# Altium PCB 遥控器V2.0.PcbDoc
Units mm, origin at the board's own origin, x right, y up, seen from the top; angles counter-clockwise.
Board outline 95.64 x 46.61 mm, 2 copper layers (Top Layer, Bottom Layer); 54 components, 52 nets, 239 pads, 54 vias.
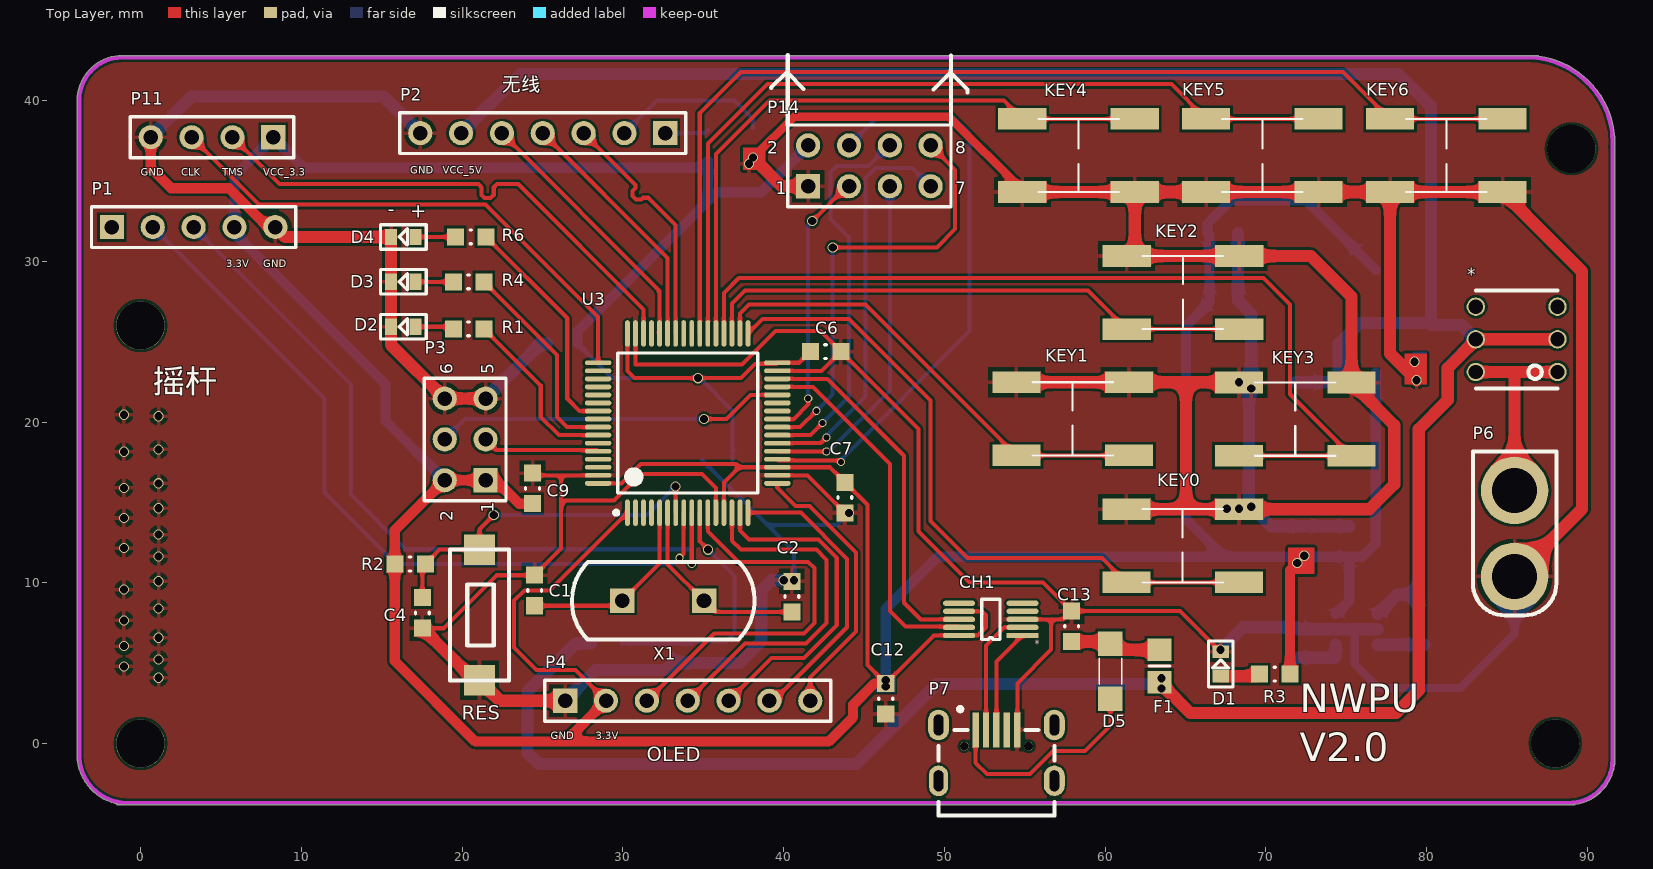
[diagram p0: Top Layer view]
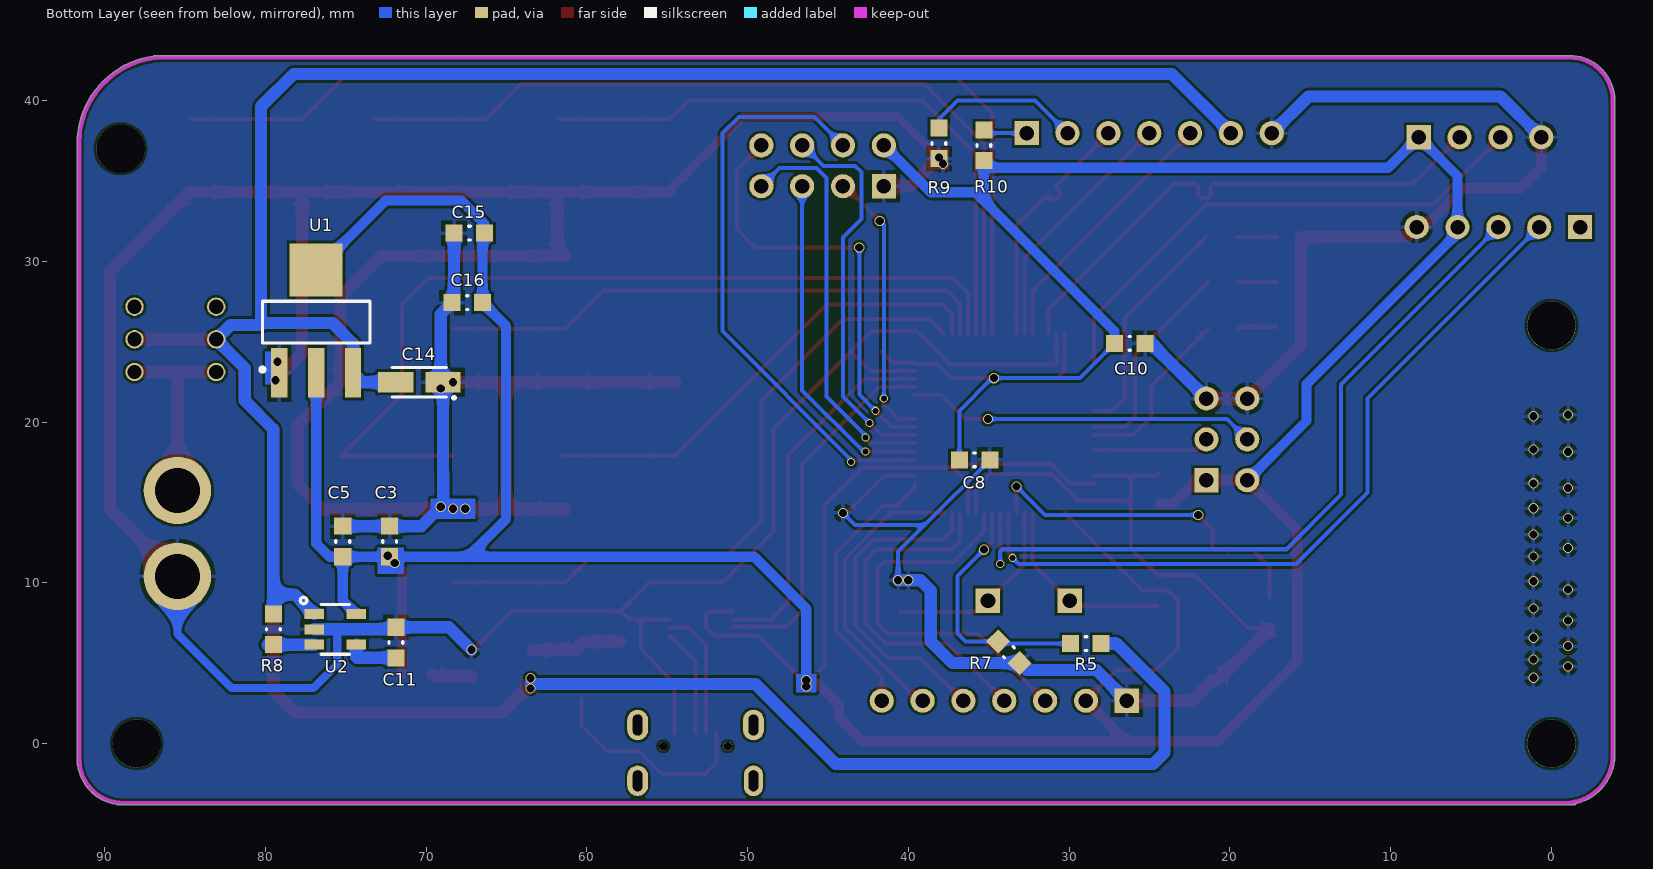
[diagram p1: Bottom Layer view, seen from below]

## Layer stack, top to bottom
Top Solder: solder mask 0.0102, Solder Resist, Dk 3.5
Top Layer: signal copper 0.0356
Dielectric 1: dielectric 0.32, FR-4, Dk 4.8
Bottom Layer: signal copper 0.0356
Bottom Solder: solder mask 0.0102, Solder Resist, Dk 3.5

## Board outline
-1.514,-3.734 cw(c-0.826,-0.699) -3.913,-1.091 cw(c-3.81,-1.016) -3.937,-1.016 -3.937,-0.763 cw(c-0.826,-0.699) -3.937,-0.634 cw(c-0.826,-0.699) -3.937,-0.632 -3.937,-0.634 -3.937,40.005 cw(c-1.143,40.005) -1.143,42.799 86.868,42.799 cw(c86.868,42.672) 86.963,42.756 cw(c86.233,37.338) 91.7,37.338 cw(c86.233,37.338) 91.694,37.081 91.694,-1.27 cw(c91.567,-1.27) 91.668,-1.348 cw(c88.837,-0.953) 89.232,-3.784 cw(c89.154,-3.683) 89.154,-3.81 88.902,-3.81 cw(c88.837,-0.953) 88.771,-3.81 cw(c88.837,-0.953) 88.77,-3.81 88.771,-3.81 -1.397,-3.81 cw(c-1.397,-3.683)

## Design rules (kind name [scope] priority, off if disabled: settings)
Clearance [All] p1: gap=0.152 ignorepadtopadclearanceinfootprint=FALSE except(0: Arc-Hole Track-Hole SMDPad-Hole THPad-Hole Via-Hole Fill-Hole Poly-Hole Region-Hole Text-Hole)
PlaneConnect [All] p1: planeconnectstyle=Direct reliefexpansion=0.508 reliefentries=4 reliefconductorwidth=0.254 reliefairgap=0.254
PolygonConnect [All] p1: connectstyle=Relief reliefconductorwidth=0.254 reliefentries=4 polygonreliefangle="90 Angle" airgapwidth=0.254
RoutingVias [All] p1: holewidth=0.711 width=1.27 viastyle="Through Hole" minholewidth=0.711 minwidth=1.27 maxholewidth=0.711 maxwidth=1.27
SolderMaskExpansion [All] p1: expansion=0.102
Width VCC_3.3 [All] p1: maxlimit=0.762 minlimit=0.254 preferedwidth=0.508
Width GND [InNet('GND')] p2: maxlimit=0.762 minlimit=0.254 preferedwidth=0.762
Width VCC_3.7 [InNet('VCC_3.7')] p3: maxlimit=0.762 minlimit=0.254 preferedwidth=0.635
Width [All] p4: maxlimit=0.762 minlimit=0.152 preferedwidth=0.254
29 further rules are at their usual default settings.

## Components (designator, comment, footprint, x,y, rotation, side; value= is the part's Value field where it differs from the comment)
* "自锁开关7*7" 自锁开关7*7 88.138,23.114 r90 top
C1 "22p" C0603 24.511,9.525 r90 top
C2 "22p" C0603 40.513,9.144 r90 top
C3 "106" C0603 72.263,12.573 r270 bottom
C4 "104" C0603 17.526,8.128 r270 top
C5 "1uF" C0603 75.184,12.573 r90 bottom
C6 "104" C0603 42.611,24.384 r0 top
C7 "104" C0603 43.815,15.306 r90 top
C8 "104" C0603 35.88,17.653 r180 bottom
C9 "104" C0603 24.384,15.875 r90 top
C10 "104" C0603 26.228,24.892 r180 bottom
C11 "22nF" C0603 71.882,6.289 r90 bottom
C12 "104" C0603 46.355,2.794 r270 top
C13 "104" C0603 57.912,7.3 r90 top
C14 "47uF" A3216 70.427,22.479 r0 bottom
C15 "104" C0603 67.31,31.75 r180 bottom
C16 "104" C0603 67.437,27.432 r180 bottom
CH1 "CH340E" CH340E 52.832,7.747 r180 top
D1 "LED_WYN" 极性0603 67.183,4.953 r90 top
D2 "LED_WYN" 极性0603 16.345,25.93 r180 top
D3 "LED_WYN" 极性0603 16.345,28.724 r180 top
D4 "LED_WYN" 极性0603 16.345,31.518 r180 top
D5 "肖特基二极管" 1206 60.325,2.794 r90 top
F1 "0.5A" 6-0805_M 63.373,4.826 r270 top
KEY0 "6*6*9mm微动开关" 6*6*9mm贴片微动开关 68.326,10.033 r180 top
KEY1 "6*6*9mm微动开关" 6*6*9mm贴片微动开关 61.483,17.929 r180 top
KEY2 "6*6*9mm微动开关" 6*6*9mm贴片微动开关 68.341,25.781 r180 top
KEY3 "6*6*9mm微动开关" 6*6*9mm贴片微动开关 75.326,17.907 r180 top
KEY4 "6*6*9mm微动开关" 6*6*9mm贴片微动开关 54.849,38.862 r0 top
KEY5 "6*6*9mm微动开关" 6*6*9mm贴片微动开关 66.279,38.862 r0 top
KEY6 "6*6*9mm微动开关" 6*6*9mm贴片微动开关 77.724,38.862 r0 top
P1 "Header 5" HDR1X5 -1.778,32.131 r0 top
P2 "Header 7" HDR1X7 32.639,37.973 r180 top
P3 "Header 3X2" HDR2X3 21.463,16.383 r90 top
P4 "Header 7" HDR1X7 26.416,2.667 r0 top
P6 "Header 2" XT30_ĸ 85.471,10.398 r270 top
P7 "Micro USB 母座" "Micro USB 直插母座" 54.54,0.847 r0 top
P11 "2_JTAG" HDR1X4 8.255,37.719 r180 top
P14 "Header 4X2" HDR2X4 41.529,34.671 r0 top
R1 "10k" C0603 20.409,25.803 r180 top
R2 "10k" C0603 16.764,11.176 r0 top
R3 "4.7k" C0603 70.551,4.318 r0 top
R4 "10k" C0603 20.409,28.724 r180 top
R5 "1k" C0603 28.956,6.223 r180 bottom
R6 "10k" C0603 20.536,31.518 r180 top
R7 "1k" C0603 33.751,5.684 r45 bottom
R8 "1k" C0603 79.502,7.112 r270 bottom
R9 "10k" R0603 38.1,37.338 r270 bottom
R10 "10k" R0603 35.306,37.211 r270 bottom
RES "RST_BUTTON" CLCK 21.082,12.065 r270 top
U1 "AMS1117-3.3V" AMS1117-SOT223 79.135,23.264 r90 bottom
U2 "RT9193" SOT-23-5 75.652,7.112 r180 bottom
U3 "STM32_F103" STM32TSQFP50P1200X1200X160-64N 34.036,19.939 r90 top
X1 "XTAL" XTAL_D 35.052,8.89 r180 top

## Footprints (in the part's own frame and the unit in brackets; to place one, negate y for a bottom-side part, rotate by r counter-clockwise, add the part's x,y. Pads: shape width x height; smd on the part's side, far side on the other; paste and mask are expansions set on the pad)
6*6*9mm贴片微动开关 [mm]
  rect 3x1.35 smd: 1(0,0) 2(7,0) 3(0,-4.55) 4(7,-4.55)
  silkscreen extent 1,-4.55 6,0, body extent 0,-4.55 7,0, height 3
6-0805_M [mm] "Chip Resistor, Body 2.0x1.2mm, IPC Low Density"
  rect 1.4x1.5 smd: 1(-1,0) 2(1,0)
  silkscreen extent 0,-0.65 0,0.65, body extent -1.07,-0.7 1.07,0.7, height 0.7
1206 [mil]
  rect 60x60 smd: 1(0,0) 2(135,0)
  silkscreen extent 35,-28 98,28
A3216 [mm] "1206封装"
  rect 2.2x1.3 smd: 1(-1.475,0) 2(1.455,0)
  silkscreen extent -2.21,-0.91 1.68,1.02, body extent -1.7,-0.9 1.7,0.9, height 1.8
AMS1117-SOT223 [mm]
  rect 3.1x1 smd: 1(-0.2,0) 2(-0.2,-2.3) 3(-0.2,-4.6)
  rect 3.3x3.3 smd: 4(6.2,-2.3)
  silkscreen extent -0.12,-5.65 4.25,1.18, body extent 1.1,-5.65 4.8,1.05, height 1.8
C0603 [mm]
  rect 1.06x1.06 smd: 1(-0.95,0) 2(0.95,0)
  silkscreen extent -0.05,-0.43 0.05,0.43, body extent -0.85,-0.48 0.85,0.47, height 0.95
CH340E [mm]
  rect 2x0.33 smd: 1(-2.032,1.016)
  oval 2x0.33 smd: 2(-2.032,0.516) 3(-2.032,0.016) 4(-2.032,-0.484) 5(-2.032,-0.984) 6(1.918,-0.984) 7(1.918,-0.484) 8(1.918,0.016) 9(1.918,0.516) 10(1.918,1.016)
  silkscreen extent -0.64,-1.23 0.51,1.27
CLCK [mil]
  rect 75x75 smd: 1(0,0) 2(320,0)
  silkscreen extent 0,-72 320,72
HDR1X4 [mm] "Connector; Header; 4 Position"
  rect 1.5x1.5 hole 0.9: 1(0,0)
  round 1.5 hole 0.9: 2(2.54,0) 3(5.08,0) 4(7.62,0)
  silkscreen extent -1.27,-1.27 8.89,1.27
HDR1X5 [mm] "Connector; Header; 5 Position"
  rect 1.5x1.5 hole 0.9: 1(0,0)
  round 1.5 hole 0.9: 2(2.54,0) 3(5.08,0) 4(7.62,0) 5(10.16,0)
  silkscreen extent -1.27,-1.27 11.43,1.27
HDR1X7 [mm] "Connector; Header; 7 Position"
  rect 1.5x1.5 hole 0.9: 1(0,0)
  round 1.5 hole 0.9: 2(2.54,0) 3(5.08,0) 4(7.62,0) 5(10.16,0) 6(12.7,0) 7(15.24,0)
  silkscreen extent -1.27,-1.27 16.51,1.27
HDR2X3 [mm] "Connector; Header; 3x2 Position"
  rect 1.5x1.5 hole 0.9: 1(0,0)
  round 1.5 hole 0.9: 2(0,2.54) 3(2.54,0) 4(2.54,2.54) 5(5.08,0) 6(5.08,2.54)
  silkscreen extent -1.27,-1.27 6.35,3.81
HDR2X4 [mm] "Connector; Header; 4x2 Position"
  rect 1.5x1.5 hole 0.9: 1(0,0)
  round 1.5 hole 0.9: 2(0,2.54) 3(2.54,0) 4(2.54,2.54) 5(5.08,0) 6(5.08,2.54) 7(7.62,0) 8(7.62,2.54)
  silkscreen extent -1.27,-1.27 8.89,3.81
"Micro USB 直插母座" [mm] "四脚直插母座"
  rect 0.4x2.15 smd: 1(-2.6,0) 2(-1.95,0) 3(-1.3,0) 4(-0.65,0) 5(0,0)
  oval 1.2x1.9 hole 0.6 slot 1.3 at 90 deg: DW(-4.9,-3.16)
  oval 1.3x1.9 hole 0.6 slot 1.3 at 90 deg: DW(-4.9,0.31) DW(2.3,-3.16) DW(2.3,0.31)
  round 0.55 hole 0.55: DW(-3.3,-1.01) DW(0.7,-1.01)
  silkscreen extent -4.9,-5.31 2.3,1.42
R0603 [mm]
  rect 1.06x1.06 smd: 1(-0.95,0) 2(0.95,0)
  silkscreen extent -0.05,-0.43 0.05,0.43, body extent -0.85,-0.48 0.85,0.47, height 0.95
SOT-23-5 [mm]
  rect 1.22x0.62 smd mask+0.07: 1(-1.31,0.95) 2(-1.31,0) 4(1.31,-0.95)
  rect 1.2x0.62 smd mask+0.07: 3(-1.31,-0.95)
  rect 1.22x0.62 smd: 5(1.31,0.95)
  silkscreen extent -2.17,-1.55 0.88,1.99, body extent -1.93,-1.45 1.92,1.45, height 1
STM32TSQFP50P1200X1200X160-64N [mm] "TSQFP, 64-Leads, Body 12.0x12.0mm (max), Pitch 0.50mm, IPC Medium Density"
  oval 1.65x0.3 smd: 1(-5.575,3.75) 2(-5.575,3.25) 3(-5.575,2.75) 4(-5.575,2.25) 5(-5.575,1.75) 6(-5.575,1.25) 7(-5.575,0.75) 8(-5.575,0.25) 9(-5.575,-0.25) 10(-5.575,-0.75) 11(-5.575,-1.25) 12(-5.575,-1.75) 13(-5.575,-2.25) 14(-5.575,-2.75) 15(-5.575,-3.25) 16(-5.575,-3.75) 33(5.575,-3.75) 34(5.575,-3.25) 35(5.575,-2.75) 36(5.575,-2.25) 37(5.575,-1.75) 38(5.575,-1.25) 39(5.575,-0.75) 40(5.575,-0.25) 41(5.575,0.25) 42(5.575,0.75) 43(5.575,1.25) 44(5.575,1.75) 45(5.575,2.25) 46(5.575,2.75) 47(5.575,3.25) 48(5.575,3.75)
  oval 0.3x1.65 smd: 17(-3.75,-5.575) 18(-3.25,-5.575) 19(-2.75,-5.575) 20(-2.25,-5.575) 21(-1.75,-5.575) 22(-1.25,-5.575) 23(-0.75,-5.575) 24(-0.25,-5.575) 25(0.25,-5.575) 26(0.75,-5.575) 27(1.25,-5.575) 28(1.75,-5.575) 29(2.25,-5.575) 30(2.75,-5.575) 31(3.25,-5.575) 32(3.75,-5.575) 49(3.75,5.575) 50(3.25,5.575) 51(2.75,5.575) 52(2.25,5.575) 53(1.75,5.575) 54(1.25,5.575) 55(0.75,5.575) 56(0.25,5.575) 57(-0.25,5.575) 58(-0.75,5.575) 59(-1.25,5.575) 60(-1.75,5.575) 61(-2.25,5.575) 62(-2.75,5.575) 63(-3.25,5.575) 64(-3.75,5.575)
  silkscreen extent -5.7,-4.35 4.35,4.57, body extent -5,-5 5,5, height 1.6
XT30_ĸ [mm]
  round 4.2 hole 2.8: 1(-5.35,0) 2(0,0)
  silkscreen extent -7.78,-2.6 2.42,2.6, body extent -7.78,-2.6 2.43,2.6, height 11
XTAL_D [mil]
  rect 60x60 hole 36 paste+0: 1(0,0) 2(200,0)
  silkscreen extent -124,-95 324,95
极性0603 [mil]
  rect 30x40 smd: 1(-30,0) 2(30,0)
  silkscreen extent -56,-30 56,30
自锁开关7*7 [mil]
  round 45 hole 35: 1(0,0) 2(80,0) 3(160,0) 4(160,200) 5(80,200) 6(0,200)
  silkscreen extent -40,0 200,200

## Part data
C1 C2 C4 C5 C6 C7 C8 C9 C10 C11: library part CAP_WYN
C3 C12 C13 C15 C16: library part Cap
C14: library part Cap_Pol
D5: library part ZENER, "Zener Diode"
F1: library part FUSE
P1: "Header, 5-Pin", LatestRevisionDate=17-Jul-2002, LatestRevisionNote="Re-released for DXP Platform.", Publisher="Altium Limited"
P2 P4: "Header, 7-Pin", LatestRevisionDate=17-Jul-2002, LatestRevisionNote="Re-released for DXP Platform.", Publisher="Altium Limited"
P3: "Header, 3-Pin, Dual row", LatestRevisionDate=17-Jul-2002, LatestRevisionNote="Re-released for DXP Platform.", Publisher="Altium Limited"
P6: "Header, 2-Pin", LatestRevisionDate=17-Jul-2002, LatestRevisionNote="Re-released for DXP Platform.", Publisher="Altium Limited"
P14: "Header, 4-Pin, Dual row", LatestRevisionDate=17-Jul-2002, LatestRevisionNote="Re-released for DXP Platform.", Publisher="Altium Limited"
R1 R2 R3 R4 R5 R6 R7: library part RES_WYN
R8: library part Resistor, "电阻"
R9 R10: library part Resistor

## Free pads (board coordinates)
  round 3 hole 3 unplated: 8(0,0) 9(88,0) 11(0,26) 12(89,37)

## Via types
v1: diameter 0.635, hole 0.508, Top Layer to Bottom Layer, 46 vias
v2: diameter 0.508, hole 0.381, Top Layer to Bottom Layer, 8 vias

## Nets (pads, with @x,y where several pads share a name; then routed paths per layer and width w, separated by ;. In a path a pad name is that pad's centre, name@x,y a point inside that pad or via, vN(x,y) a via of type N, cw(c..) or ccw(c..) an arc to the next point about the centre after c; other vN are vias at no path point)
ADC: R5.1 R7.2 U3.10 | length 15.9
  Top Layer w0.254: U3.10 34.786,12.585 v1(35.306,12.065) v1@35.433,11.938
  Bottom Layer w0.254: R5.1 34.29,6.223 R7.2 36.455,6.356 36.957,6.858 36.957,10.414 v1(35.306,12.065)
BOOT0: P3.3 U3.60 | length 7.3
  Top Layer w0.254: P3.3 22.126,18.26 28.39,18.26 U3.60
BOOT1: P3.4 U3.28 | length 21.8
  Top Layer w0.254: v1(35.052,20.193) 36.449,20.193 37.945,21.689 U3.28
  Bottom Layer w0.254: P3.4 20.193,20.193 v1(35.052,20.193)
CE: P14.3 U3.25 | length 17
  Top Layer w0.254: U3.25 40.636,20.189 41.529,21.082 v2(41.529,21.463) ; v1(41.783,32.512) 43.942,34.671 P14.3
  Bottom Layer w0.254: v2(41.529,21.463) 41.529,32.258 v1(41.783,32.512)
CH340_D+: CH1.1 P7.3 | length 6.7
  Top Layer w0.254: P7.3@53.245,0.681 53.245,5.112 CH1.1
CH340_D-: CH1.2 P7.2 | length 8.2
  Top Layer w0.254: P7.2@52.595,0.681 52.595,6.113 53.713,7.231 CH1.2
CS: P4.7 U3.17 | length 17.3
  Top Layer w0.254: U3.17 39.611,15.888 40.729,14.77 41.624,14.77 44.501,11.894 44.501,6.969 41.656,4.124 P4.7
CSN: P14.4 U3.20 | length 36.4
  Top Layer w0.254: U3.20 39.682,17.618 43.469,17.618 v2(43.561,17.526)
  Bottom Layer w0.254: v2(43.561,17.526) 43.561,17.653 51.562,25.654 51.562,37.973 50.546,38.989 45.847,38.989 P14.4
D0: P4.3 U3.11 | length 24.6
  Top Layer w0.254: P4.3 35.687,6.858 41.275,6.858 41.91,7.493 41.91,10.922 41.529,11.303 37.191,11.303 35.286,13.208 U3.11
D1: P4.4 U3.14 | length 22.7
  Top Layer w0.254: P4.4 37.592,6.223 41.402,6.223 42.672,7.493 42.672,11.43 42.037,12.065 37.338,12.065 36.786,12.617 U3.14
DC: P4.6 U3.16 | length 18.3
  Top Layer w0.254: U3.16 41.075,14.364 43.942,11.497 43.942,7.239 39.37,2.667 P4.6
GND: C1.2 C2.2 C3.1 C4.2 C5.2 C6.2 C7.1 C8.2 C9.2 C10.2 C11.2 C12.2 C13.2 C14.1 C15.1 C16.1 CH1.3 D1.2 D2.2 D3.2 D4.2 KEY0.3 KEY0.4 KEY1.3 KEY1.4 KEY2.3 KEY2.4 KEY3.3 KEY3.4 KEY4.3 KEY4.4 KEY5.3 KEY5.4 KEY6.3 KEY6.4 P1.5 P2.7 P3.5 P3.6 P4.1 P6.2 P7.5 P11.4 P14.1 R7.1 R9.2 RES.2 U1.1 U2.2 U3.12 U3.18 U3.31 U3.47 U3.63 | length 422.8
  Top Layer w0.254: C4.2 18.862,7.178 22.159,10.475 C1.2 26.162,12.126 26.162,14.859 ; C9.2 24.52,16.689 26.162,16.689 ; U3.63 26.162,16.689 ; U3.47 30.786,23.57 37.413,23.57 39.497,25.654 42.291,25.654 C6.2 ; U3.12 35.786,15.903 34.925,16.764 31.115,16.764 29.464,15.113 26.416,15.113 26.162,14.859 ; U3.18 41.482,16.689 C7.1 ; U3.31 42.366,23.189 C6.2 ; P7.5@54.545,0.621 54.545,3.745 56.642,5.842 56.642,7.731 ; CH1.3 56.642,7.731 ; D1.2 64.648,8.25 C13.2 ; 26.162,14.859 26.162,16.689 ; C6.2 48.387,19.558 48.387,13.208 51.562,10.033 56.129,10.033 C13.2 ; 56.642,7.731 57.393,7.731 C13.2
  Top Layer w0.508: v1(38.1,36.449) 40.64,38.989 50.292,38.989 54.849,34.432 KEY4.3
  Top Layer w0.635: P11.4 0.635,35.814 1.905,34.544 5.506,34.544 7.919,32.131 P1.5
  Top Layer w0.762: P1.5 8.995,31.518 D4.2 D2.2 15.583,24.803 P3.6 P3.5 ; C4.2 20.767,3.937 RES.2 22.352,2.667 P4.1 ; v1(38.1,36.449) 39.878,34.671 P14.1 ; KEY1.4 KEY1.3 65.024,22.479 ; KEY4.3 KEY4.4 ; KEY0.4 65.024,14.583 ; KEY3.4 68.304,22.479 65.024,22.479 ; v1(79.375,22.606) 77.724,24.257 KEY6.3 ; P6.2 89.662,14.589 89.662,29.374 KEY6.4 KEY6.3 ; KEY4.4 KEY5.3 KEY5.4 KEY6.3 ; KEY4.4 61.849,30.839 KEY2.4 KEY2.3 72.793,30.331 75.326,27.798 KEY3.3 77.978,19.805 77.978,16.129 76.432,14.583 KEY0.3 65.024,14.583 ; 65.024,14.583 65.024,22.479
  Bottom Layer w0.254: C8.2 38.991,13.591 ; v1(40.64,10.16) 40.64,11.943 38.991,13.591 ; v1(44.069,14.351) 43.309,13.591 38.991,13.591
  Bottom Layer w0.508: 75.522,7.064 75.522,4.939 76.998,3.464 82.11,3.464 85.471,6.824 P6.2
  Bottom Layer w0.762: P11.4 3.175,40.259 15.113,40.259 P2.7 ; P3.5 24.892,24.892 C10.2 ; P4.1 28.321,4.572 32.639,4.572 R7.1 37.27,5.012 38.608,6.35 38.608,9.525 39.243,10.16 v1(40.005,10.16) v1(40.64,10.16) ; v1(67.183,5.842) 68.58,7.239 C11.2 72.009,7.112 U2.2 ; C15.1 68.26,27.559 C16.1 69.088,26.731 v1(69.088,22.098) ; C14.1@68.952,22.098 68.952,16.882 68.928,16.858 68.928,14.511 v1@68.961,14.478 ; v1(69.088,14.732) 70.297,13.523 C3.1 C5.2
  other v1: 1.122,4.1 -1.033,4.804 1.122,5.225 -1.033,6.069 1.122,6.584 -1.033,7.662 1.122,8.411 -1.033,9.583 1.122,10.099 1.122,11.645 -1.033,12.16 1.122,13.003 -1.033,14.035 67.564,14.605 68.326,14.605 1.122,14.644 -1.033,15.909 1.122,16.19 -1.033,18.158 1.122,18.299 1.122,20.36 -1.033,20.454 68.326,22.479 79.248,23.749 37.846,36.068
IRQ: P14.8 U3.24 | length 27.4
  Top Layer w0.254: U3.24 41.025,19.689 v2(42.037,20.701) ; v1(43.053,30.861) 49.53,30.861 50.673,32.004 50.673,35.687 P14.8
  Bottom Layer w0.254: v2(42.037,20.701) 43.053,21.717 v1(43.053,30.861)
JTCK: P11.3 U3.49 | length 32.8
  Top Layer w0.254: P11.3 7.366,33.528 21.463,33.528 28.461,26.53 U3.49
JTMS: P11.2 U3.46 | length 32.8
  Top Layer w0.254: P11.2 8.636,34.798 14.732,34.798 21.018,34.798 21.209,34.608 21.209,34.135 21.399,33.945 21.78,33.945 21.971,34.135 21.971,34.608 22.162,34.798 22.352,34.798 23.495,34.798 31.286,27.007 U3.46
KEY0: KEY0.1 KEY0.2 U3.33 | length 42.1
  Top Layer w0.254: U3.33 38.688,26.416 44.069,26.416 49.149,21.336 49.149,13.843 51.435,11.557 59.802,11.557 KEY0.2 KEY0.1
KEY1: KEY1.1 KEY1.2 U3.34 | length 29.5
  Top Layer w0.254: U3.34 37.286,26.745 37.846,27.305 45.107,27.305 KEY1.2 KEY1.1
KEY2: KEY2.1 KEY2.2 U3.35 | length 34.8
  Top Layer w0.254: U3.35 36.786,27.388 37.592,28.194 58.928,28.194 KEY2.2 KEY2.1
KEY3: KEY3.1 KEY3.2 U3.36 | length 56.8
  Top Layer w0.254: U3.36 36.286,28.031 37.211,28.956 69.85,28.956 71.501,27.305 71.501,21.732 KEY3.1 KEY3.2
KEY4: KEY4.1 KEY4.2 U3.37 | length 39.1
  Top Layer w0.254: U3.37 35.786,36.675 39.116,40.005 53.706,40.005 KEY4.1 KEY4.2
KEY5: KEY5.1 KEY5.2 U3.38 | length 52.2
  Top Layer w0.254: U3.38 35.286,37.318 38.989,41.021 64.12,41.021 KEY5.1 KEY5.2
KEY6: KEY6.1 KEY6.2 U3.39 | length 65.9
  Top Layer w0.254: U3.39 34.786,39.231 37.338,41.783 74.803,41.783 KEY6.1 KEY6.2
LED0: R1.1 U3.58 | length 11
  Top Layer w0.254: R1.1 24.892,22.269 24.892,20.32 26.023,19.189 U3.58
LED1: R4.1 U3.57 | length 13.1
  Top Layer w0.254: R4.1 25.908,24.175 25.908,20.32 26.539,19.689 U3.57
LED2: R6.1 U3.55 | length 14.4
  Top Layer w0.254: R6.1 26.543,26.46 26.543,21.463 27.317,20.689 U3.55
MISO: P14.7 U3.22 | length 25.2
  Top Layer w0.254: U3.22 42.311,18.689 v2(42.672,19.05)
  Bottom Layer w0.254: v2(42.672,19.05) 42.672,19.177 45.098,21.603 45.098,35.097 45.085,35.111 45.085,35.179 45.72,35.814 48.006,35.814 P14.7
MOSI: P14.6 U3.23 | length 24.3
  Top Layer w0.254: U3.23 41.668,19.189 v2(42.418,19.939)
  Bottom Layer w0.254: v2(42.418,19.939) 44.069,21.59 44.069,31.496 42.926,32.639 42.926,35.56 43.307,35.941 45.272,35.941 46.542,37.211 P14.6
Net*_1: *.1 *.6 P6.1 | length 12.5
  Top Layer w0.762: *.6 85.625,23.114 ; P6.1 85.471,22.96 85.625,23.114 ; *.1 85.625,23.114
NetC11_1: C11.1 U2.4 | length 3.3
  Bottom Layer w0.762: C11.1 74.3,5.339 74.342,5.381 U2.4
NetC13_1: C13.1 D5.2 F1.1 | length 5.7
  Top Layer w0.762: C13.1 60.198,6.35 D5.2 60.722,5.826 F1.1
NetD1_1: D1.1 R3.1 | length 2.5
  Top Layer w0.762: D1.1 69.474,4.191 R3.1
NetD2_1: D2.1 R1.2 | length 2.4
  Top Layer w0.254: D2.1 19.332,25.93 R1.2
NetD3_1: D3.1 R4.2 | length 2.4
  Top Layer w0.254: D3.1 R4.2
NetD4_1: D4.1 R6.2 | length 2.5
  Top Layer w0.254: D4.1 R6.2
NetD5_1: D5.1 P7.1 | length 13.5
  Top Layer w0.254: P7.1@51.944,0.681 51.944,-1.192 52.64,-1.888 55.33,-1.888 56.765,-0.452 58.745,-0.452 60.325,1.128 D5.1
NetP2_1: P2.1 R10.1 | length 2.7
  Bottom Layer w0.254: P2.1 35.118,37.973 R10.1
NetP2_2: P2.2 R9.1 | length 9.9
  Bottom Layer w0.254: P2.2 32.131,40.005 36.957,40.005 38.1,38.862 R9.1
NetR8_2: R8.2 U2.3 | length 2.9
  Bottom Layer w0.762: U2.3@76.962,6.156 R8.2@79.87,6.156
OSCIN: C1.1 U3.5 X1.2 | length 12
  Top Layer w0.254: C1.1 29.657,8.575 X1.2 32.286,11.204 U3.5
OSCOUT: C2.1 U3.6 X1.1 | length 12.2
  Top Layer w0.254: U3.6 32.786,11.156 X1.1 35.748,8.194 C2.1
PA11: P2.5 U3.44 | length 16.6
  Top Layer w0.254: P2.5 32.286,28.166 32.233,28.113 32.286,28.059 U3.44 U3.44@32.233,25.567
RES: P4.5 U3.15 | length 20.7
  Top Layer w0.254: P4.5 39.243,5.334 41.275,5.334 43.307,7.366 43.307,11.557 42.164,12.7 37.846,12.7 37.286,13.26 U3.15
RESET: C4.1 R2.2 RES.1 U3.7 | length 22.1
  Top Layer w0.254: C4.1 17.526,10.988 R2.2 18.603,12.065 RES.1 21.082,13.335 v1(21.971,14.224) ; v1(33.274,16.002) 33.286,15.99 U3.7
  Bottom Layer w0.254: v1(21.971,14.224) 31.496,14.224 v1(33.274,16.002)
SCK: P14.5 U3.21 | length 21.3
  Top Layer w0.254: U3.21 39.639,18.161 v2(42.672,18.161)
  Bottom Layer w0.254: v2(42.672,18.161) 42.799,18.161 46.609,21.971 P14.5
U1_RX: P2.4 U3.43 | length 15.7
  Top Layer w0.254: P2.4 32.786,30.206 U3.43
U1_TX: P2.3 U3.42 | length 15.6
  Top Layer w0.254: P2.3 30.797,34.734 30.797,34.573 30.607,34.383 30.607,34.059 30.823,33.844 31.146,33.844 31.255,33.953 31.579,33.953 31.686,33.846 33.286,32.246 U3.42
U3_RX: CH1.8 U3.30 | length 22.9
  Top Layer w0.254: U3.30 42.716,22.689 47.498,17.907 47.498,8.763 48.53,7.731 CH1.8
U3_TX: CH1.9 U3.29 | length 22.9
  Top Layer w0.254: U3.29 41.819,22.189 46.609,17.399 46.609,8.255 47.577,7.287 50.858,7.287 CH1.9
VCC_3.3: C3.2 C5.1 C6.1 C7.2 C8.1 C9.1 C10.1 C12.1 C15.2 C16.2 CH1.7 CH1.10 P1.4 P3.1 P3.2 P4.2 P11.1 P14.2 R2.1 R3.2 R10.2 U1.2 U1.4 U2.5 U3.1 U3.13 U3.19 U3.32 U3.48 U3.64 | length 321.2
  Top Layer w0.254: U3.64 29.905,16.189 31.115,17.399 37.016,17.399 37.226,17.189 ; P4.2 27.051,4.572 24.638,4.572 23.241,5.969 23.241,8.89 23.876,9.525 25.447,9.525 U3.1 ; U3.48 30.286,23.181 30.734,22.733 v1(34.671,22.733) 37.338,22.733 38.223,23.618 39.54,23.618 U3.32 40.966,23.689 C6.1 ; U3.13 36.286,16.249 37.226,17.189 ; CH1.7 52.348,8.231 52.578,8.001 52.578,7.239 52.07,6.731 CH1.10 49.342,6.731 C12.1 45.212,4.887 45.212,14.859 C7.2 42.882,17.189 U3.19 37.226,17.189
  Top Layer w0.635: C9.1 23.556,14.925 21.844,16.637 21.717,16.637 P3.1 P3.2 15.814,13.274 R2.1 15.814,5.141 20.828,0.127 26.416,0.127 ; P4.2 26.416,0.127 ; C12.1 45.654,3.744 44.323,2.413 44.323,1.651 42.799,0.127 26.416,0.127 ; R3.2 71.501,10.795 v1(71.945,11.239) v1(72.39,11.684)
  Bottom Layer w0.254: C10.1 29.337,22.733 v1(34.671,22.733) 34.798,22.733 36.83,20.701 C8.1
  Bottom Layer w0.635: P3.2 15.24,20.066 15.24,22.352 5.842,31.75 P1.4 5.842,35.306 P11.1 10.16,35.814 34.859,35.814 R10.2 35.306,33.782 ; C10.1 27.178,25.654 35.306,33.782 ; P14.2 38.608,34.29 35.814,34.29 35.306,33.782 ; v1(46.355,3.556) v1(46.355,3.937) 46.355,8.382 49.596,11.623 67.371,11.623 ; U2.5 75.184,8.904 C5.1 ; U1.2 76.835,12.446 76.012,11.623 C5.1 ; U1.4 72.517,33.782 67.818,33.782 66.36,32.324 C15.2 66.487,31.623 C16.2 65.024,25.969 65.024,13.97 67.371,11.623 ; 67.371,11.623 C3.2 C5.1
VCC_5: *.2 *.5 C14.2 F1.2 P2.6 R5.2 R8.1 U1.3 U2.1 | length 208.4
  Top Layer w0.762: F1.2 65.294,1.905 78.105,1.905 79.502,3.302 79.502,19.558 81.312,21.368 81.312,23.352 83.058,25.098 *.5 *.2
  Bottom Layer w0.762: P2.6 23.622,41.656 78.232,41.656 80.264,39.624 80.264,26.035 82.169,26.035 *.5 81.281,23.369 81.281,21.337 79.502,19.558 79.502,9.271 ; R5.2 27.051,6.223 24.066,3.238 24.066,-0.572 24.768,-1.273 44.524,-1.273 49.504,3.707 v1@63.5,3.707 ; C14.2 73.95,22.479 U1.3 74.535,24.878 75.819,26.162 80.01,26.162 ; U2.1 78.171,9.271 79.502,9.271 ; R8.1 79.502,9.271
  other v1: 63.5,3.429 63.5,4.064
VRX: P1.2 U3.8 | length 47.9
  Top Layer w0.254: v2(33.528,11.557) 33.536,11.557 33.786,11.807 U3.8
  Bottom Layer w0.254: P1.2 11.43,21.463 11.43,15.621 15.875,11.176 33.147,11.176 v2(33.528,11.557)
VRY: P1.3 U3.9 | length 47.3
  Top Layer w0.254: U3.9 34.286,11.18 v2(34.29,11.176)
  Bottom Layer w0.254: P1.3 13.081,22.352 13.081,15.494 16.485,12.09 34.138,12.09 34.29,11.938 v2(34.29,11.176)
pads on no net: *.3 *.4 CH1.4 CH1.5 CH1.6 P1.1 P7.4 P7.DW U3.2 U3.3 U3.4 U3.26 U3.27 U3.40 U3.41 U3.45 U3.50 U3.51 U3.52 U3.53 U3.54 U3.56 U3.59 U3.61 U3.62

## Polygon pours and split planes (outlines as drawn)
GND on Bottom Layer "Top Layer-No Net" (solid, remove dead copper, pour order 12): -7.708,46.942 93.712,46.942 96.184,44.471 94.142,42.43 94.142,-8.495 -4.807,-8.495 -7.493,-5.809
GND on Top Layer "Top Layer-No Net" (solid, remove dead copper, pour order 14): -7.278,43.719 -6.419,44.578 94.035,44.578 94.035,-3.768 91.241,-6.562 89.629,-4.95 -6.74,-4.95

## Keep-outs
Keep-Out Layer:
  lines w0.254: -3.81,-1.016 -3.81,3.937 ; -3.81,-0.635 ccw(c-0.826,-0.699) -0.889,-3.683 ; -3.81,2.159 -3.81,40.005 cw(c-1.143,40.005) -1.143,42.672 86.868,42.672 ; -1.397,-3.683 89.154,-3.683 ; 86.487,42.672 cw(c86.233,37.338) 91.567,37.084 91.567,-1.27 ; 88.773,-3.683 ccw(c88.837,-0.953) 91.567,-1.016

## Other copper
Top Layer:
  rectangle net VCC_3.3: 71.374,10.541 73.025,12.192
  rectangle net GND: 78.613,22.352 80.01,24.257
  rectangle net GND: 37.465,35.687 38.862,37.084
Bottom Layer:
  rectangle net VCC_3.3: 71.374,10.541 73.025,12.192
  rectangle net GND: 79.121,22.352 80.01,24.384
  rectangle net VCC_3.3: 45.72,3.175 46.99,4.318
  rectangle net GND: 66.929,13.97 69.723,15.24

## Silkscreen, mask and mechanical layers (free items; w line width, h text height)
Top Overlay:
  lines w0.254: 39.23,40.799 40.136,41.705 40.149,41.705 40.267,41.705 41.244,40.729 ; 40.259,38.481 40.259,42.819 ; 49.326,40.696 50.387,41.756 ; 50.387,41.881 50.387,41.756 ; 50.419,38.481 50.419,42.799 ; 51.447,40.509 51.447,40.696 50.387,41.756
  text "无线" at 22.479,40.259 h1.52
  text "GND" at 16.764,35.306 h0.76
  text "VCC_5V" at 18.796,35.306 h0.76
  text "GND" at 0,35.179 h0.76
  text "CLK" at 2.54,35.179 h0.76
  text "TMS" at 5.08,35.179 h0.76
  text "VCC_3.3" at 7.62,35.179 h0.76
  text "-" at 15.367,32.512 h1.52
  text "+" at 16.764,32.385 h1.52
  text "3.3V" at 5.334,29.464 h0.76
  text "GND" at 7.62,29.464 h0.76
  text "摇杆" at 0.762,21.336 h2.54
  text "*" at 55.626,5.842 h0.76
  text "GND" at 25.527,0.127 h0.76
  text "3.3V" at 28.321,0.127 h0.76
  text "OLED" at 31.496,-1.397 h1.52
  text "NWPU  / V2.0" at 72.103,-1.702 h3.05

## Text inside footprints (layer, text, board x,y; h text height)
P3: Top Overlay "6" at 19.431,22.987 h0.76 r90; Top Overlay "5" at 21.971,22.987 h0.76 r90; Top Overlay "2" at 19.431,13.843 h0.76 r90; Top Overlay "1" at 21.971,14.351 h0.76 r90
P14: Top Overlay "2" at 38.989,36.703 h0.76; Top Overlay "1" at 39.497,34.163 h0.76; Top Overlay "7" at 50.673,34.163 h0.76; Top Overlay "8" at 50.673,36.703 h0.76